# EAGLE board GPS_Breakout-Panel-v10 (EAGLE 6.3), part 1 of 2
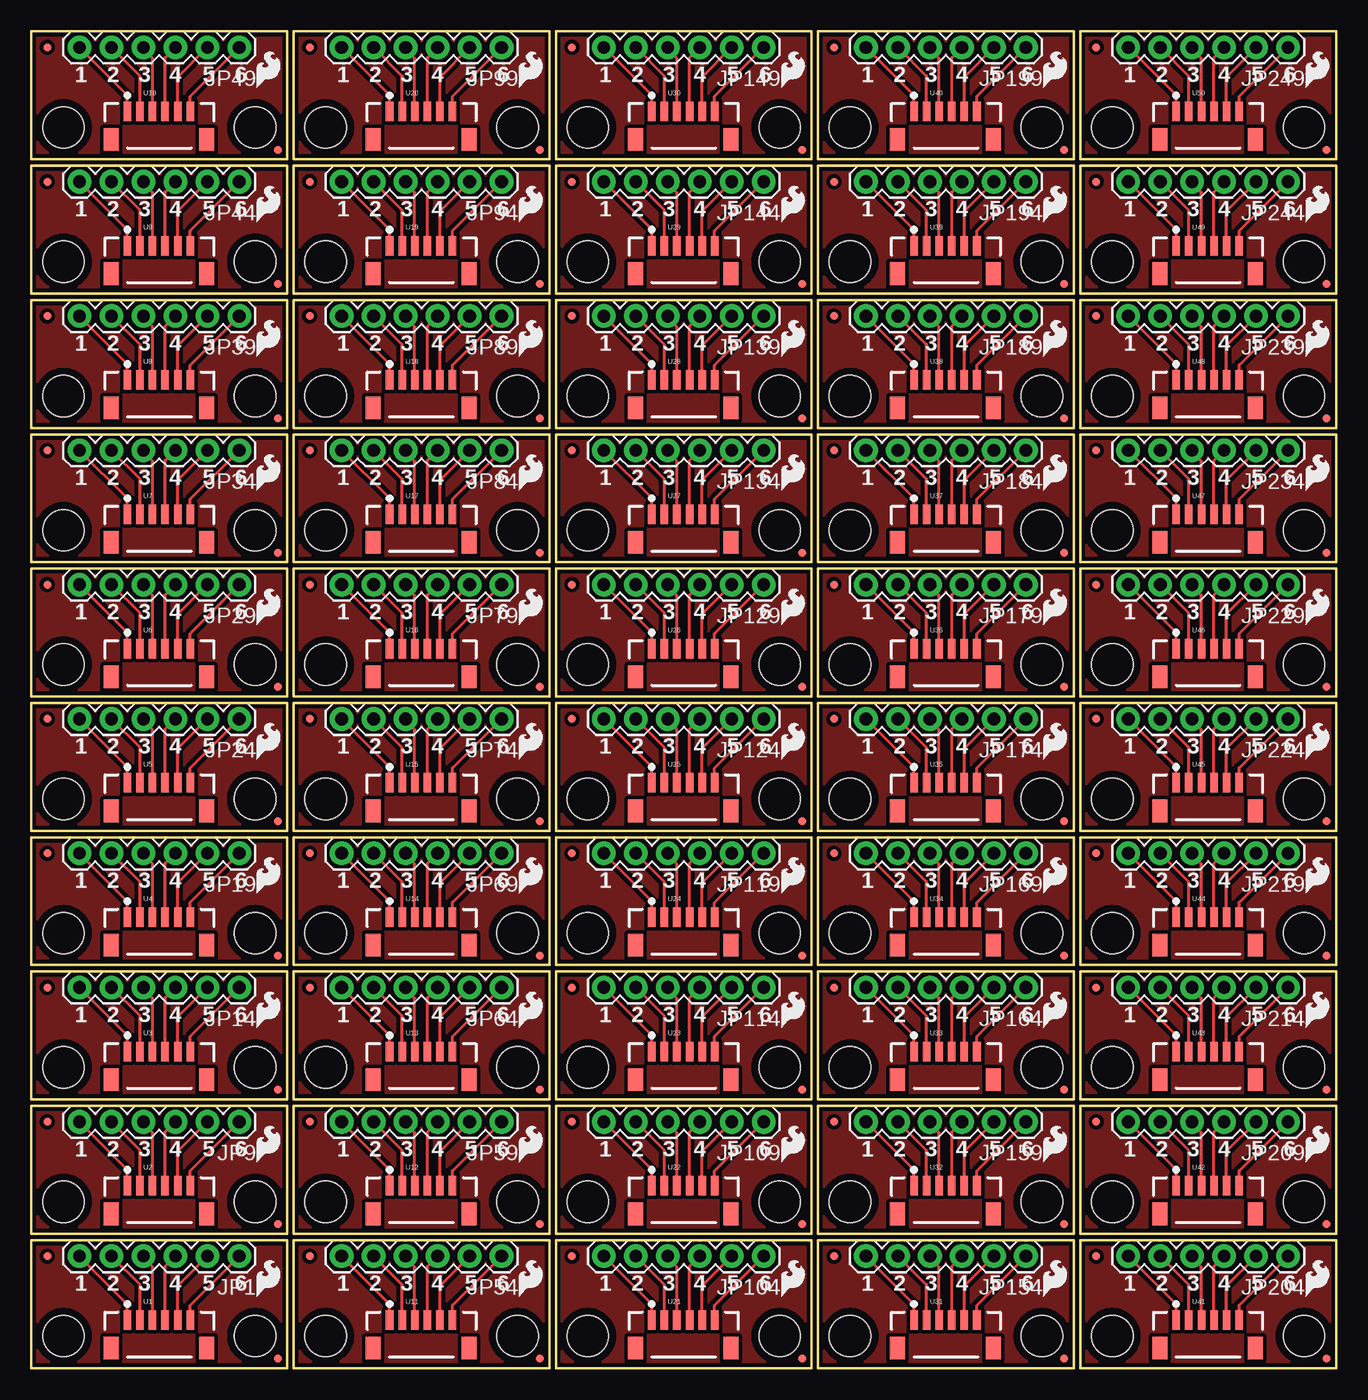
[diagram p0: board, top side]
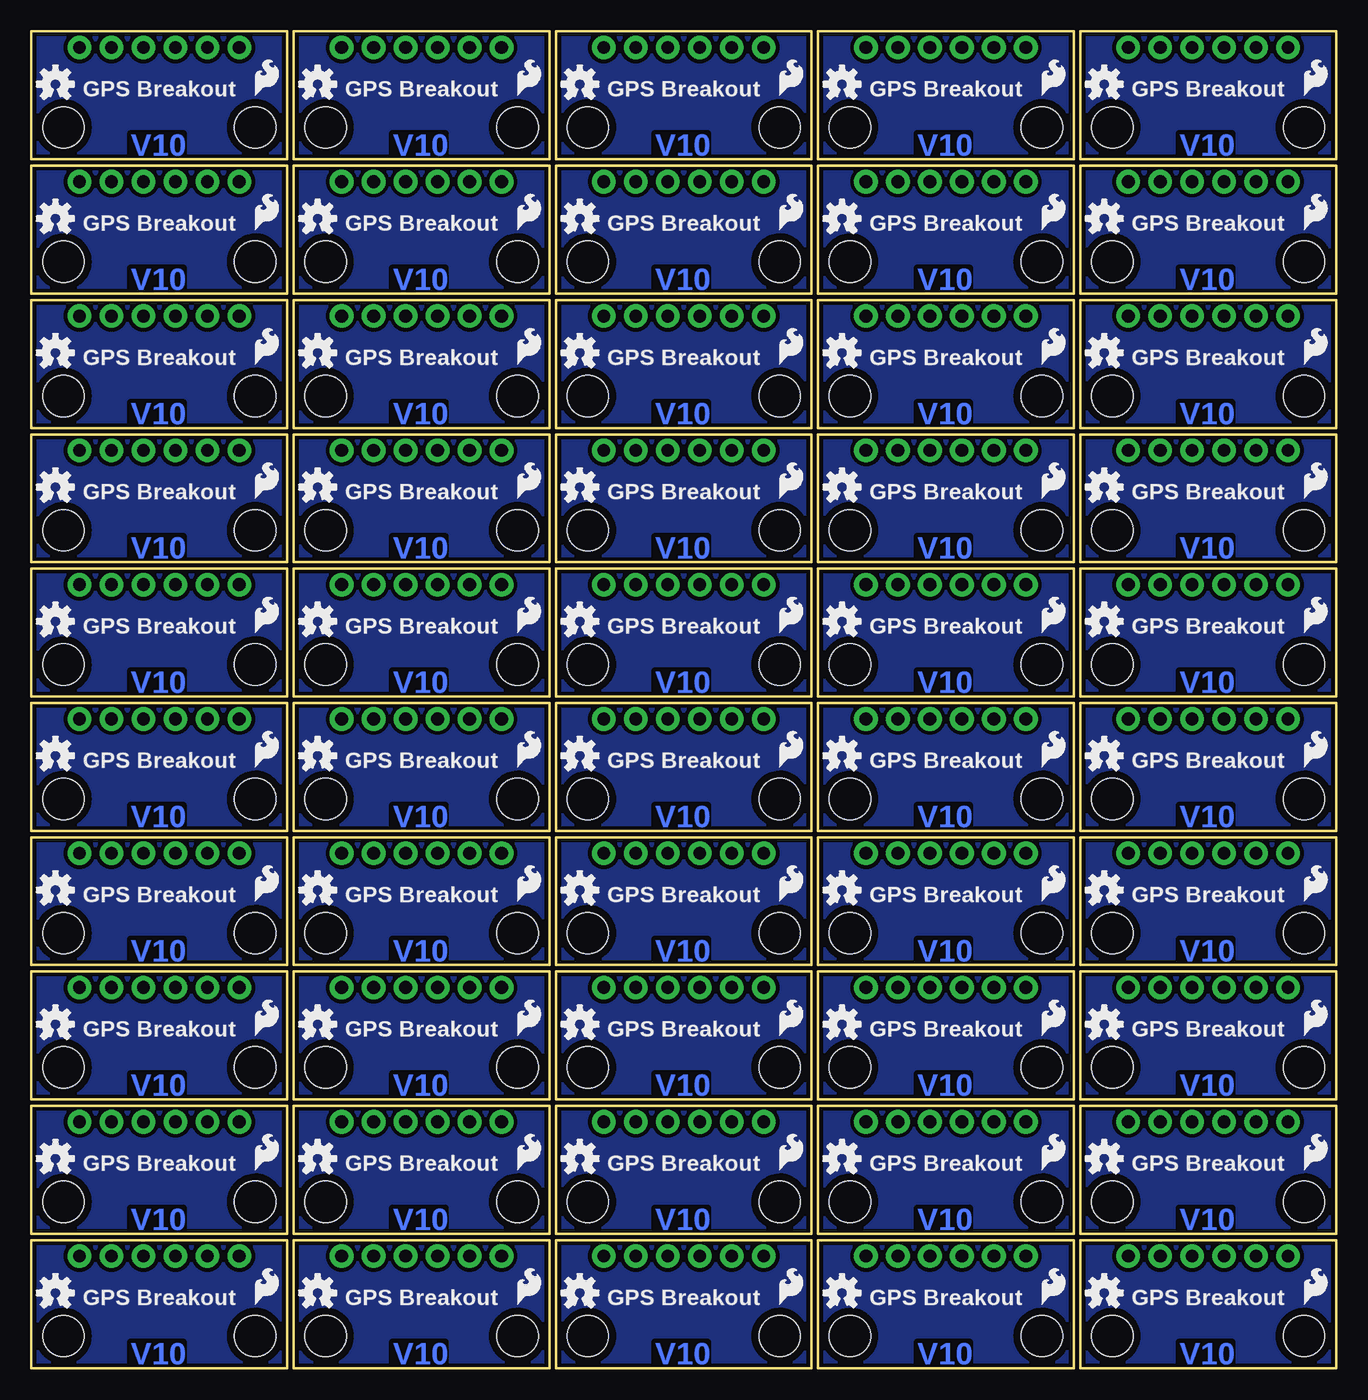
[diagram p1: board, bottom side, seen from below]

Size 103.63 x 106.17 mm. Coordinates in mm from the lower left corner, seen from the top.
Outline: 0,0 0,10.16 20.32,10.16 20.32,0 0,0
Outline: 0,10.67 0,20.83 20.32,20.83 20.32,10.67 0,10.67
Outline: 0,21.34 0,31.5 20.32,31.5 20.32,21.34 0,21.34
Outline: 0,32 0,42.16 20.32,42.16 20.32,32 0,32
Outline: 0,42.67 0,52.83 20.32,52.83 20.32,42.67 0,42.67
Outline: 0,53.34 0,63.5 20.32,63.5 20.32,53.34 0,53.34
Outline: 0,64.01 0,74.17 20.32,74.17 20.32,64.01 0,64.01
Outline: 0,74.68 0,84.84 20.32,84.84 20.32,74.68 0,74.68
Outline: 0,85.34 0,95.5 20.32,95.5 20.32,85.34 0,85.34
Outline: 0,96.01 0,106.17 20.32,106.17 20.32,96.01 0,96.01
Outline: 20.83,0 20.83,10.16 41.15,10.16 41.15,0 20.83,0
Outline: 20.83,10.67 20.83,20.83 41.15,20.83 41.15,10.67 20.83,10.67
Outline: 20.83,21.34 20.83,31.5 41.15,31.5 41.15,21.34 20.83,21.34
Outline: 20.83,32 20.83,42.16 41.15,42.16 41.15,32 20.83,32
Outline: 20.83,42.67 20.83,52.83 41.15,52.83 41.15,42.67 20.83,42.67
Outline: 20.83,53.34 20.83,63.5 41.15,63.5 41.15,53.34 20.83,53.34
Outline: 20.83,64.01 20.83,74.17 41.15,74.17 41.15,64.01 20.83,64.01
Outline: 20.83,74.68 20.83,84.84 41.15,84.84 41.15,74.68 20.83,74.68
Outline: 20.83,85.34 20.83,95.5 41.15,95.5 41.15,85.34 20.83,85.34
Outline: 20.83,96.01 20.83,106.17 41.15,106.17 41.15,96.01 20.83,96.01
Outline: 41.66,0 41.66,10.16 61.98,10.16 61.98,0 41.66,0
Outline: 41.66,10.67 41.66,20.83 61.98,20.83 61.98,10.67 41.66,10.67
Outline: 41.66,21.34 41.66,31.5 61.98,31.5 61.98,21.34 41.66,21.34
Outline: 41.66,32 41.66,42.16 61.98,42.16 61.98,32 41.66,32
Outline: 41.66,42.67 41.66,52.83 61.98,52.83 61.98,42.67 41.66,42.67
Outline: 41.66,53.34 41.66,63.5 61.98,63.5 61.98,53.34 41.66,53.34
Outline: 41.66,64.01 41.66,74.17 61.98,74.17 61.98,64.01 41.66,64.01
Outline: 41.66,74.68 41.66,84.84 61.98,84.84 61.98,74.68 41.66,74.68
Outline: 41.66,85.34 41.66,95.5 61.98,95.5 61.98,85.34 41.66,85.34
Outline: 41.66,96.01 41.66,106.17 61.98,106.17 61.98,96.01 41.66,96.01
Outline: 62.48,0 62.48,10.16 82.8,10.16 82.8,0 62.48,0
Outline: 62.48,10.67 62.48,20.83 82.8,20.83 82.8,10.67 62.48,10.67
Outline: 62.48,21.34 62.48,31.5 82.8,31.5 82.8,21.34 62.48,21.34
Outline: 62.48,32 62.48,42.16 82.8,42.16 82.8,32 62.48,32
Outline: 62.48,42.67 62.48,52.83 82.8,52.83 82.8,42.67 62.48,42.67
Outline: 62.48,53.34 62.48,63.5 82.8,63.5 82.8,53.34 62.48,53.34
Outline: 62.48,64.01 62.48,74.17 82.8,74.17 82.8,64.01 62.48,64.01
Outline: 62.48,74.68 62.48,84.84 82.8,84.84 82.8,74.68 62.48,74.68
Outline: 62.48,85.34 62.48,95.5 82.8,95.5 82.8,85.34 62.48,85.34
Outline: 62.48,96.01 62.48,106.17 82.8,106.17 82.8,96.01 62.48,96.01
Outline: 83.31,0 83.31,10.16 103.63,10.16 103.63,0 83.31,0
Outline: 83.31,10.67 83.31,20.83 103.63,20.83 103.63,10.67 83.31,10.67
Outline: 83.31,21.34 83.31,31.5 103.63,31.5 103.63,21.34 83.31,21.34
Outline: 83.31,32 83.31,42.16 103.63,42.16 103.63,32 83.31,32
Outline: 83.31,42.67 83.31,52.83 103.63,52.83 103.63,42.67 83.31,42.67
Outline: 83.31,53.34 83.31,63.5 103.63,63.5 103.63,53.34 83.31,53.34
Outline: 83.31,64.01 83.31,74.17 103.63,74.17 103.63,64.01 83.31,64.01
Outline: 83.31,74.68 83.31,84.84 103.63,84.84 103.63,74.68 83.31,74.68
Outline: 83.31,85.34 83.31,95.5 103.63,95.5 103.63,85.34 83.31,85.34
Outline: 83.31,96.01 83.31,106.17 103.63,106.17 103.63,96.01 83.31,96.01
Copper layers (1*16): Top 0.035mm / dielectric 1.5mm / Bottom 0.035mm
Design rules "default": minimum track width 8mil, minimum drill 20mil, track to track 8mil, track to pad 8mil, pad to pad 8mil, via to via 8mil, smd to smd 8mil, copper to edge 8mil, drill to drill 8mil, minimum pad ring 12mil, minimum via ring 10mil, stop-mask expansion 4mil, vias tented up to drill 20mil, thermal gap 10mil

## Footprints (pad centres in the part's own frame; a part is rotated, then mirrored left to right if it is on the bottom)
MICRO-FIDUCIAL = smd 0.635 x 0.635: 1 0,0
1X06 = drill 1.016 pad 1.88: 1 0,0; 2 2.54,0; 3 5.08,0; 4 7.62,0; 5 10.16,0; 6 12.7,0
STAND-OFF = hole 3.302: 0,0
JST-6-SMD-VERT-1.0MM = smd 0.6 x 1.55: 1 -2.54,1.27; 2 -1.54,1.27; 3 -0.54,1.27; 4 0.46,1.27; 5 1.46,1.27; 6 2.46,1.27 | smd 1.2 x 1.8: P$1 -3.84,-0.955; P$2 3.76,-0.955

## Placement (x,y rotation side)
FID1  FIDUCIALUFIDUCIAL  [MICRO-FIDUCIAL]  19.56,0.76 0 top
FID2  FIDUCIALUFIDUCIAL  [MICRO-FIDUCIAL]  1.27,8.89 0 top
FID3  FIDUCIALUFIDUCIAL  [MICRO-FIDUCIAL]  19.56,11.43 0 top
FID4  FIDUCIALUFIDUCIAL  [MICRO-FIDUCIAL]  1.27,19.56 0 top
FID5  FIDUCIALUFIDUCIAL  [MICRO-FIDUCIAL]  19.56,22.1 0 top
FID6  FIDUCIALUFIDUCIAL  [MICRO-FIDUCIAL]  1.27,30.23 0 top
FID7  FIDUCIALUFIDUCIAL  [MICRO-FIDUCIAL]  19.56,32.77 0 top
FID8  FIDUCIALUFIDUCIAL  [MICRO-FIDUCIAL]  1.27,40.89 0 top
FID9  FIDUCIALUFIDUCIAL  [MICRO-FIDUCIAL]  19.56,43.43 0 top
FID10  FIDUCIALUFIDUCIAL  [MICRO-FIDUCIAL]  1.27,51.56 0 top
FID11  FIDUCIALUFIDUCIAL  [MICRO-FIDUCIAL]  19.56,54.1 0 top
FID12  FIDUCIALUFIDUCIAL  [MICRO-FIDUCIAL]  1.27,62.23 0 top
FID13  FIDUCIALUFIDUCIAL  [MICRO-FIDUCIAL]  19.56,64.77 0 top
FID14  FIDUCIALUFIDUCIAL  [MICRO-FIDUCIAL]  1.27,72.9 0 top
FID15  FIDUCIALUFIDUCIAL  [MICRO-FIDUCIAL]  19.56,75.44 0 top
FID16  FIDUCIALUFIDUCIAL  [MICRO-FIDUCIAL]  1.27,83.57 0 top
FID17  FIDUCIALUFIDUCIAL  [MICRO-FIDUCIAL]  19.56,86.11 0 top
FID18  FIDUCIALUFIDUCIAL  [MICRO-FIDUCIAL]  1.27,94.23 0 top
FID19  FIDUCIALUFIDUCIAL  [MICRO-FIDUCIAL]  19.56,96.77 0 top
FID20  FIDUCIALUFIDUCIAL  [MICRO-FIDUCIAL]  1.27,104.9 0 top
FID21  FIDUCIALUFIDUCIAL  [MICRO-FIDUCIAL]  40.39,0.76 0 top
FID22  FIDUCIALUFIDUCIAL  [MICRO-FIDUCIAL]  22.1,8.89 0 top
FID23  FIDUCIALUFIDUCIAL  [MICRO-FIDUCIAL]  40.39,11.43 0 top
FID24  FIDUCIALUFIDUCIAL  [MICRO-FIDUCIAL]  22.1,19.56 0 top
FID25  FIDUCIALUFIDUCIAL  [MICRO-FIDUCIAL]  40.39,22.1 0 top
FID26  FIDUCIALUFIDUCIAL  [MICRO-FIDUCIAL]  22.1,30.23 0 top
FID27  FIDUCIALUFIDUCIAL  [MICRO-FIDUCIAL]  40.39,32.77 0 top
FID28  FIDUCIALUFIDUCIAL  [MICRO-FIDUCIAL]  22.1,40.89 0 top
FID29  FIDUCIALUFIDUCIAL  [MICRO-FIDUCIAL]  40.39,43.43 0 top
FID30  FIDUCIALUFIDUCIAL  [MICRO-FIDUCIAL]  22.1,51.56 0 top
FID31  FIDUCIALUFIDUCIAL  [MICRO-FIDUCIAL]  40.39,54.1 0 top
FID32  FIDUCIALUFIDUCIAL  [MICRO-FIDUCIAL]  22.1,62.23 0 top
FID33  FIDUCIALUFIDUCIAL  [MICRO-FIDUCIAL]  40.39,64.77 0 top
FID34  FIDUCIALUFIDUCIAL  [MICRO-FIDUCIAL]  22.1,72.9 0 top
FID35  FIDUCIALUFIDUCIAL  [MICRO-FIDUCIAL]  40.39,75.44 0 top
FID36  FIDUCIALUFIDUCIAL  [MICRO-FIDUCIAL]  22.1,83.57 0 top
FID37  FIDUCIALUFIDUCIAL  [MICRO-FIDUCIAL]  40.39,86.11 0 top
FID38  FIDUCIALUFIDUCIAL  [MICRO-FIDUCIAL]  22.1,94.23 0 top
FID39  FIDUCIALUFIDUCIAL  [MICRO-FIDUCIAL]  40.39,96.77 0 top
FID40  FIDUCIALUFIDUCIAL  [MICRO-FIDUCIAL]  22.1,104.9 0 top
FID41  FIDUCIALUFIDUCIAL  [MICRO-FIDUCIAL]  61.21,0.76 0 top
FID42  FIDUCIALUFIDUCIAL  [MICRO-FIDUCIAL]  42.93,8.89 0 top
FID43  FIDUCIALUFIDUCIAL  [MICRO-FIDUCIAL]  61.21,11.43 0 top
FID44  FIDUCIALUFIDUCIAL  [MICRO-FIDUCIAL]  42.93,19.56 0 top
FID45  FIDUCIALUFIDUCIAL  [MICRO-FIDUCIAL]  61.21,22.1 0 top
FID46  FIDUCIALUFIDUCIAL  [MICRO-FIDUCIAL]  42.93,30.23 0 top
FID47  FIDUCIALUFIDUCIAL  [MICRO-FIDUCIAL]  61.21,32.77 0 top
FID48  FIDUCIALUFIDUCIAL  [MICRO-FIDUCIAL]  42.93,40.89 0 top
FID49  FIDUCIALUFIDUCIAL  [MICRO-FIDUCIAL]  61.21,43.43 0 top
FID50  FIDUCIALUFIDUCIAL  [MICRO-FIDUCIAL]  42.93,51.56 0 top
FID51  FIDUCIALUFIDUCIAL  [MICRO-FIDUCIAL]  61.21,54.1 0 top
FID52  FIDUCIALUFIDUCIAL  [MICRO-FIDUCIAL]  42.93,62.23 0 top
FID53  FIDUCIALUFIDUCIAL  [MICRO-FIDUCIAL]  61.21,64.77 0 top
FID54  FIDUCIALUFIDUCIAL  [MICRO-FIDUCIAL]  42.93,72.9 0 top
FID55  FIDUCIALUFIDUCIAL  [MICRO-FIDUCIAL]  61.21,75.44 0 top
FID56  FIDUCIALUFIDUCIAL  [MICRO-FIDUCIAL]  42.93,83.57 0 top
FID57  FIDUCIALUFIDUCIAL  [MICRO-FIDUCIAL]  61.21,86.11 0 top
FID58  FIDUCIALUFIDUCIAL  [MICRO-FIDUCIAL]  42.93,94.23 0 top
FID59  FIDUCIALUFIDUCIAL  [MICRO-FIDUCIAL]  61.21,96.77 0 top
FID60  FIDUCIALUFIDUCIAL  [MICRO-FIDUCIAL]  42.93,104.9 0 top
FID61  FIDUCIALUFIDUCIAL  [MICRO-FIDUCIAL]  82.04,0.76 0 top
FID62  FIDUCIALUFIDUCIAL  [MICRO-FIDUCIAL]  63.75,8.89 0 top
FID63  FIDUCIALUFIDUCIAL  [MICRO-FIDUCIAL]  82.04,11.43 0 top
FID64  FIDUCIALUFIDUCIAL  [MICRO-FIDUCIAL]  63.75,19.56 0 top
FID65  FIDUCIALUFIDUCIAL  [MICRO-FIDUCIAL]  82.04,22.1 0 top
FID66  FIDUCIALUFIDUCIAL  [MICRO-FIDUCIAL]  63.75,30.23 0 top
FID67  FIDUCIALUFIDUCIAL  [MICRO-FIDUCIAL]  82.04,32.77 0 top
FID68  FIDUCIALUFIDUCIAL  [MICRO-FIDUCIAL]  63.75,40.89 0 top
FID69  FIDUCIALUFIDUCIAL  [MICRO-FIDUCIAL]  82.04,43.43 0 top
FID70  FIDUCIALUFIDUCIAL  [MICRO-FIDUCIAL]  63.75,51.56 0 top
FID71  FIDUCIALUFIDUCIAL  [MICRO-FIDUCIAL]  82.04,54.1 0 top
FID72  FIDUCIALUFIDUCIAL  [MICRO-FIDUCIAL]  63.75,62.23 0 top
FID73  FIDUCIALUFIDUCIAL  [MICRO-FIDUCIAL]  82.04,64.77 0 top
FID74  FIDUCIALUFIDUCIAL  [MICRO-FIDUCIAL]  63.75,72.9 0 top
FID75  FIDUCIALUFIDUCIAL  [MICRO-FIDUCIAL]  82.04,75.44 0 top
FID76  FIDUCIALUFIDUCIAL  [MICRO-FIDUCIAL]  63.75,83.57 0 top
FID77  FIDUCIALUFIDUCIAL  [MICRO-FIDUCIAL]  82.04,86.11 0 top
FID78  FIDUCIALUFIDUCIAL  [MICRO-FIDUCIAL]  63.75,94.23 0 top
FID79  FIDUCIALUFIDUCIAL  [MICRO-FIDUCIAL]  82.04,96.77 0 top
FID80  FIDUCIALUFIDUCIAL  [MICRO-FIDUCIAL]  63.75,104.9 0 top
FID81  FIDUCIALUFIDUCIAL  [MICRO-FIDUCIAL]  102.87,0.76 0 top
FID82  FIDUCIALUFIDUCIAL  [MICRO-FIDUCIAL]  84.58,8.89 0 top
FID83  FIDUCIALUFIDUCIAL  [MICRO-FIDUCIAL]  102.87,11.43 0 top
FID84  FIDUCIALUFIDUCIAL  [MICRO-FIDUCIAL]  84.58,19.56 0 top
FID85  FIDUCIALUFIDUCIAL  [MICRO-FIDUCIAL]  102.87,22.1 0 top
FID86  FIDUCIALUFIDUCIAL  [MICRO-FIDUCIAL]  84.58,30.23 0 top
FID87  FIDUCIALUFIDUCIAL  [MICRO-FIDUCIAL]  102.87,32.77 0 top
FID88  FIDUCIALUFIDUCIAL  [MICRO-FIDUCIAL]  84.58,40.89 0 top
FID89  FIDUCIALUFIDUCIAL  [MICRO-FIDUCIAL]  102.87,43.43 0 top
FID90  FIDUCIALUFIDUCIAL  [MICRO-FIDUCIAL]  84.58,51.56 0 top
FID91  FIDUCIALUFIDUCIAL  [MICRO-FIDUCIAL]  102.87,54.1 0 top
FID92  FIDUCIALUFIDUCIAL  [MICRO-FIDUCIAL]  84.58,62.23 0 top
FID93  FIDUCIALUFIDUCIAL  [MICRO-FIDUCIAL]  102.87,64.77 0 top
FID94  FIDUCIALUFIDUCIAL  [MICRO-FIDUCIAL]  84.58,72.9 0 top
FID95  FIDUCIALUFIDUCIAL  [MICRO-FIDUCIAL]  102.87,75.44 0 top
FID96  FIDUCIALUFIDUCIAL  [MICRO-FIDUCIAL]  84.58,83.57 0 top
FID97  FIDUCIALUFIDUCIAL  [MICRO-FIDUCIAL]  102.87,86.11 0 top
FID98  FIDUCIALUFIDUCIAL  [MICRO-FIDUCIAL]  84.58,94.23 0 top
FID99  FIDUCIALUFIDUCIAL  [MICRO-FIDUCIAL]  102.87,96.77 0 top
FID100  FIDUCIALUFIDUCIAL  [MICRO-FIDUCIAL]  84.58,104.9 0 top
JP1  [1X06]  16.51,8.89 180 top
JP2  LOGO-SFESK  [SFE-LOGO-FLAME]  17.91,5.71 0 top
JP3  STAND-OFF  [STAND-OFF]  2.54,13.21 0 top
JP4  STAND-OFF  [STAND-OFF]  2.54,2.54 0 top
JP5  STAND-OFF  [STAND-OFF]  17.78,13.21 0 top
JP6  STAND-OFF  [STAND-OFF]  17.78,2.54 0 top
JP7  LOGO-SFESK  [SFE-LOGO-FLAME]  2.54,5.08 0 bottom
JP8  LOGO-SFESK  [SFE-LOGO-FLAME]  2.54,15.75 0 bottom
JP9  [1X06]  16.51,19.56 180 top
JP10  LOGO-SFESK  [SFE-LOGO-FLAME]  17.91,16.38 0 top
JP11  STAND-OFF  [STAND-OFF]  2.54,23.88 0 top
JP12  STAND-OFF  [STAND-OFF]  17.78,23.88 0 top
JP13  LOGO-SFESK  [SFE-LOGO-FLAME]  2.54,26.42 0 bottom
JP14  [1X06]  16.51,30.23 180 top
JP15  LOGO-SFESK  [SFE-LOGO-FLAME]  17.91,27.05 0 top
JP16  STAND-OFF  [STAND-OFF]  2.54,34.54 0 top
JP17  STAND-OFF  [STAND-OFF]  17.78,34.54 0 top
JP18  LOGO-SFESK  [SFE-LOGO-FLAME]  2.54,37.08 0 bottom
JP19  [1X06]  16.51,40.89 180 top
JP20  LOGO-SFESK  [SFE-LOGO-FLAME]  17.91,37.72 0 top
JP21  STAND-OFF  [STAND-OFF]  2.54,45.21 0 top
JP22  STAND-OFF  [STAND-OFF]  17.78,45.21 0 top
JP23  LOGO-SFESK  [SFE-LOGO-FLAME]  2.54,47.75 0 bottom
JP24  [1X06]  16.51,51.56 180 top
JP25  LOGO-SFESK  [SFE-LOGO-FLAME]  17.91,48.39 0 top
JP26  STAND-OFF  [STAND-OFF]  2.54,55.88 0 top
JP27  STAND-OFF  [STAND-OFF]  17.78,55.88 0 top
JP28  LOGO-SFESK  [SFE-LOGO-FLAME]  2.54,58.42 0 bottom
JP29  [1X06]  16.51,62.23 180 top
JP30  LOGO-SFESK  [SFE-LOGO-FLAME]  17.91,59.05 0 top
JP31  STAND-OFF  [STAND-OFF]  2.54,66.55 0 top
JP32  STAND-OFF  [STAND-OFF]  17.78,66.55 0 top
JP33  LOGO-SFESK  [SFE-LOGO-FLAME]  2.54,69.09 0 bottom
JP34  [1X06]  16.51,72.9 180 top
JP35  LOGO-SFESK  [SFE-LOGO-FLAME]  17.91,69.72 0 top
JP36  STAND-OFF  [STAND-OFF]  2.54,77.22 0 top
JP37  STAND-OFF  [STAND-OFF]  17.78,77.22 0 top
JP38  LOGO-SFESK  [SFE-LOGO-FLAME]  2.54,79.76 0 bottom
JP39  [1X06]  16.51,83.57 180 top
JP40  LOGO-SFESK  [SFE-LOGO-FLAME]  17.91,80.39 0 top
JP41  STAND-OFF  [STAND-OFF]  2.54,87.88 0 top
JP42  STAND-OFF  [STAND-OFF]  17.78,87.88 0 top
JP43  LOGO-SFESK  [SFE-LOGO-FLAME]  2.54,90.42 0 bottom
JP44  [1X06]  16.51,94.23 180 top
JP45  LOGO-SFESK  [SFE-LOGO-FLAME]  17.91,91.06 0 top
JP46  STAND-OFF  [STAND-OFF]  2.54,98.55 0 top
JP47  STAND-OFF  [STAND-OFF]  17.78,98.55 0 top
JP48  LOGO-SFESK  [SFE-LOGO-FLAME]  2.54,101.09 0 bottom
JP49  [1X06]  16.51,104.9 180 top
JP50  LOGO-SFESK  [SFE-LOGO-FLAME]  17.91,101.73 0 top
JP51  STAND-OFF  [STAND-OFF]  23.37,2.54 0 top
JP52  STAND-OFF  [STAND-OFF]  38.61,2.54 0 top
JP53  LOGO-SFESK  [SFE-LOGO-FLAME]  23.37,5.08 0 bottom
JP54  [1X06]  37.34,8.89 180 top
JP55  LOGO-SFESK  [SFE-LOGO-FLAME]  38.73,5.71 0 top
JP56  STAND-OFF  [STAND-OFF]  23.37,13.21 0 top
JP57  STAND-OFF  [STAND-OFF]  38.61,13.21 0 top
JP58  LOGO-SFESK  [SFE-LOGO-FLAME]  23.37,15.75 0 bottom
JP59  [1X06]  37.34,19.56 180 top
JP60  LOGO-SFESK  [SFE-LOGO-FLAME]  38.73,16.38 0 top
JP61  STAND-OFF  [STAND-OFF]  23.37,23.88 0 top
JP62  STAND-OFF  [STAND-OFF]  38.61,23.88 0 top
JP63  LOGO-SFESK  [SFE-LOGO-FLAME]  23.37,26.42 0 bottom
JP64  [1X06]  37.34,30.23 180 top
JP65  LOGO-SFESK  [SFE-LOGO-FLAME]  38.73,27.05 0 top
JP66  STAND-OFF  [STAND-OFF]  23.37,34.54 0 top
JP67  STAND-OFF  [STAND-OFF]  38.61,34.54 0 top
JP68  LOGO-SFESK  [SFE-LOGO-FLAME]  23.37,37.08 0 bottom
JP69  [1X06]  37.34,40.89 180 top
JP70  LOGO-SFESK  [SFE-LOGO-FLAME]  38.73,37.72 0 top
JP71  STAND-OFF  [STAND-OFF]  23.37,45.21 0 top
JP72  STAND-OFF  [STAND-OFF]  38.61,45.21 0 top
JP73  LOGO-SFESK  [SFE-LOGO-FLAME]  23.37,47.75 0 bottom
JP74  [1X06]  37.34,51.56 180 top
JP75  LOGO-SFESK  [SFE-LOGO-FLAME]  38.73,48.39 0 top
JP76  STAND-OFF  [STAND-OFF]  23.37,55.88 0 top
JP77  STAND-OFF  [STAND-OFF]  38.61,55.88 0 top
JP78  LOGO-SFESK  [SFE-LOGO-FLAME]  23.37,58.42 0 bottom
JP79  [1X06]  37.34,62.23 180 top
JP80  LOGO-SFESK  [SFE-LOGO-FLAME]  38.73,59.05 0 top
JP81  STAND-OFF  [STAND-OFF]  23.37,66.55 0 top
JP82  STAND-OFF  [STAND-OFF]  38.61,66.55 0 top
JP83  LOGO-SFESK  [SFE-LOGO-FLAME]  23.37,69.09 0 bottom
JP84  [1X06]  37.34,72.9 180 top
JP85  LOGO-SFESK  [SFE-LOGO-FLAME]  38.73,69.72 0 top
JP86  STAND-OFF  [STAND-OFF]  23.37,77.22 0 top
JP87  STAND-OFF  [STAND-OFF]  38.61,77.22 0 top
JP88  LOGO-SFESK  [SFE-LOGO-FLAME]  23.37,79.76 0 bottom
JP89  [1X06]  37.34,83.57 180 top
JP90  LOGO-SFESK  [SFE-LOGO-FLAME]  38.73,80.39 0 top
JP91  STAND-OFF  [STAND-OFF]  23.37,87.88 0 top
JP92  STAND-OFF  [STAND-OFF]  38.61,87.88 0 top
JP93  LOGO-SFESK  [SFE-LOGO-FLAME]  23.37,90.42 0 bottom
JP94  [1X06]  37.34,94.23 180 top
JP95  LOGO-SFESK  [SFE-LOGO-FLAME]  38.73,91.06 0 top
JP96  STAND-OFF  [STAND-OFF]  23.37,98.55 0 top
JP97  STAND-OFF  [STAND-OFF]  38.61,98.55 0 top
JP98  LOGO-SFESK  [SFE-LOGO-FLAME]  23.37,101.09 0 bottom
JP99  [1X06]  37.34,104.9 180 top
JP100  LOGO-SFESK  [SFE-LOGO-FLAME]  38.73,101.73 0 top
JP101  STAND-OFF  [STAND-OFF]  44.2,2.54 0 top
JP102  STAND-OFF  [STAND-OFF]  59.44,2.54 0 top
JP103  LOGO-SFESK  [SFE-LOGO-FLAME]  44.2,5.08 0 bottom
JP104  [1X06]  58.17,8.89 180 top
JP105  LOGO-SFESK  [SFE-LOGO-FLAME]  59.56,5.71 0 top
JP106  STAND-OFF  [STAND-OFF]  44.2,13.21 0 top
JP107  STAND-OFF  [STAND-OFF]  59.44,13.21 0 top
JP108  LOGO-SFESK  [SFE-LOGO-FLAME]  44.2,15.75 0 bottom
JP109  [1X06]  58.17,19.56 180 top
JP110  LOGO-SFESK  [SFE-LOGO-FLAME]  59.56,16.38 0 top
JP111  STAND-OFF  [STAND-OFF]  44.2,23.88 0 top
JP112  STAND-OFF  [STAND-OFF]  59.44,23.88 0 top
JP113  LOGO-SFESK  [SFE-LOGO-FLAME]  44.2,26.42 0 bottom
JP114  [1X06]  58.17,30.23 180 top
JP115  LOGO-SFESK  [SFE-LOGO-FLAME]  59.56,27.05 0 top
JP116  STAND-OFF  [STAND-OFF]  44.2,34.54 0 top
JP117  STAND-OFF  [STAND-OFF]  59.44,34.54 0 top
JP118  LOGO-SFESK  [SFE-LOGO-FLAME]  44.2,37.08 0 bottom
JP119  [1X06]  58.17,40.89 180 top
JP120  LOGO-SFESK  [SFE-LOGO-FLAME]  59.56,37.72 0 top
JP121  STAND-OFF  [STAND-OFF]  44.2,45.21 0 top
JP122  STAND-OFF  [STAND-OFF]  59.44,45.21 0 top
JP123  LOGO-SFESK  [SFE-LOGO-FLAME]  44.2,47.75 0 bottom
JP124  [1X06]  58.17,51.56 180 top
JP125  LOGO-SFESK  [SFE-LOGO-FLAME]  59.56,48.39 0 top
JP126  STAND-OFF  [STAND-OFF]  44.2,55.88 0 top
JP127  STAND-OFF  [STAND-OFF]  59.44,55.88 0 top
JP128  LOGO-SFESK  [SFE-LOGO-FLAME]  44.2,58.42 0 bottom
JP129  [1X06]  58.17,62.23 180 top
JP130  LOGO-SFESK  [SFE-LOGO-FLAME]  59.56,59.05 0 top
JP131  STAND-OFF  [STAND-OFF]  44.2,66.55 0 top
JP132  STAND-OFF  [STAND-OFF]  59.44,66.55 0 top
JP133  LOGO-SFESK  [SFE-LOGO-FLAME]  44.2,69.09 0 bottom
JP134  [1X06]  58.17,72.9 180 top
JP135  LOGO-SFESK  [SFE-LOGO-FLAME]  59.56,69.72 0 top
JP136  STAND-OFF  [STAND-OFF]  44.2,77.22 0 top
JP137  STAND-OFF  [STAND-OFF]  59.44,77.22 0 top
JP138  LOGO-SFESK  [SFE-LOGO-FLAME]  44.2,79.76 0 bottom
JP139  [1X06]  58.17,83.57 180 top
JP140  LOGO-SFESK  [SFE-LOGO-FLAME]  59.56,80.39 0 top
JP141  STAND-OFF  [STAND-OFF]  44.2,87.88 0 top
JP142  STAND-OFF  [STAND-OFF]  59.44,87.88 0 top
JP143  LOGO-SFESK  [SFE-LOGO-FLAME]  44.2,90.42 0 bottom
JP144  [1X06]  58.17,94.23 180 top
JP145  LOGO-SFESK  [SFE-LOGO-FLAME]  59.56,91.06 0 top
JP146  STAND-OFF  [STAND-OFF]  44.2,98.55 0 top
JP147  STAND-OFF  [STAND-OFF]  59.44,98.55 0 top
JP148  LOGO-SFESK  [SFE-LOGO-FLAME]  44.2,101.09 0 bottom
JP149  [1X06]  58.17,104.9 180 top
JP150  LOGO-SFESK  [SFE-LOGO-FLAME]  59.56,101.73 0 top
JP151  STAND-OFF  [STAND-OFF]  65.02,2.54 0 top
JP152  STAND-OFF  [STAND-OFF]  80.26,2.54 0 top
JP153  LOGO-SFESK  [SFE-LOGO-FLAME]  65.02,5.08 0 bottom
JP154  [1X06]  78.99,8.89 180 top
JP155  LOGO-SFESK  [SFE-LOGO-FLAME]  80.39,5.71 0 top
JP156  STAND-OFF  [STAND-OFF]  65.02,13.21 0 top
JP157  STAND-OFF  [STAND-OFF]  80.26,13.21 0 top
JP158  LOGO-SFESK  [SFE-LOGO-FLAME]  65.02,15.75 0 bottom
JP159  [1X06]  78.99,19.56 180 top
JP160  LOGO-SFESK  [SFE-LOGO-FLAME]  80.39,16.38 0 top
JP161  STAND-OFF  [STAND-OFF]  65.02,23.88 0 top
JP162  STAND-OFF  [STAND-OFF]  80.26,23.88 0 top
JP163  LOGO-SFESK  [SFE-LOGO-FLAME]  65.02,26.42 0 bottom
JP164  [1X06]  78.99,30.23 180 top
JP165  LOGO-SFESK  [SFE-LOGO-FLAME]  80.39,27.05 0 top
JP166  STAND-OFF  [STAND-OFF]  65.02,34.54 0 top
JP167  STAND-OFF  [STAND-OFF]  80.26,34.54 0 top
JP168  LOGO-SFESK  [SFE-LOGO-FLAME]  65.02,37.08 0 bottom
JP169  [1X06]  78.99,40.89 180 top
JP170  LOGO-SFESK  [SFE-LOGO-FLAME]  80.39,37.72 0 top
JP171  STAND-OFF  [STAND-OFF]  65.02,45.21 0 top
JP172  STAND-OFF  [STAND-OFF]  80.26,45.21 0 top
JP173  LOGO-SFESK  [SFE-LOGO-FLAME]  65.02,47.75 0 bottom
JP174  [1X06]  78.99,51.56 180 top
JP175  LOGO-SFESK  [SFE-LOGO-FLAME]  80.39,48.39 0 top
JP176  STAND-OFF  [STAND-OFF]  65.02,55.88 0 top
JP177  STAND-OFF  [STAND-OFF]  80.26,55.88 0 top
JP178  LOGO-SFESK  [SFE-LOGO-FLAME]  65.02,58.42 0 bottom
JP179  [1X06]  78.99,62.23 180 top
JP180  LOGO-SFESK  [SFE-LOGO-FLAME]  80.39,59.05 0 top
JP181  STAND-OFF  [STAND-OFF]  65.02,66.55 0 top
JP182  STAND-OFF  [STAND-OFF]  80.26,66.55 0 top
JP183  LOGO-SFESK  [SFE-LOGO-FLAME]  65.02,69.09 0 bottom
JP184  [1X06]  78.99,72.9 180 top
JP185  LOGO-SFESK  [SFE-LOGO-FLAME]  80.39,69.72 0 top
JP186  STAND-OFF  [STAND-OFF]  65.02,77.22 0 top
JP187  STAND-OFF  [STAND-OFF]  80.26,77.22 0 top
JP188  LOGO-SFESK  [SFE-LOGO-FLAME]  65.02,79.76 0 bottom
JP189  [1X06]  78.99,83.57 180 top
JP190  LOGO-SFESK  [SFE-LOGO-FLAME]  80.39,80.39 0 top
JP191  STAND-OFF  [STAND-OFF]  65.02,87.88 0 top
JP192  STAND-OFF  [STAND-OFF]  80.26,87.88 0 top
JP193  LOGO-SFESK  [SFE-LOGO-FLAME]  65.02,90.42 0 bottom
JP194  [1X06]  78.99,94.23 180 top
JP195  LOGO-SFESK  [SFE-LOGO-FLAME]  80.39,91.06 0 top
JP196  STAND-OFF  [STAND-OFF]  65.02,98.55 0 top
JP197  STAND-OFF  [STAND-OFF]  80.26,98.55 0 top
JP198  LOGO-SFESK  [SFE-LOGO-FLAME]  65.02,101.09 0 bottom
JP199  [1X06]  78.99,104.9 180 top
JP200  LOGO-SFESK  [SFE-LOGO-FLAME]  80.39,101.73 0 top
JP201  STAND-OFF  [STAND-OFF]  85.85,2.54 0 top
JP202  STAND-OFF  [STAND-OFF]  101.09,2.54 0 top
JP203  LOGO-SFESK  [SFE-LOGO-FLAME]  85.85,5.08 0 bottom
JP204  [1X06]  99.82,8.89 180 top
JP205  LOGO-SFESK  [SFE-LOGO-FLAME]  101.22,5.71 0 top
JP206  STAND-OFF  [STAND-OFF]  85.85,13.21 0 top
JP207  STAND-OFF  [STAND-OFF]  101.09,13.21 0 top
JP208  LOGO-SFESK  [SFE-LOGO-FLAME]  85.85,15.75 0 bottom
JP209  [1X06]  99.82,19.56 180 top
JP210  LOGO-SFESK  [SFE-LOGO-FLAME]  101.22,16.38 0 top
JP211  STAND-OFF  [STAND-OFF]  85.85,23.88 0 top
JP212  STAND-OFF  [STAND-OFF]  101.09,23.88 0 top
JP213  LOGO-SFESK  [SFE-LOGO-FLAME]  85.85,26.42 0 bottom
JP214  [1X06]  99.82,30.23 180 top
JP215  LOGO-SFESK  [SFE-LOGO-FLAME]  101.22,27.05 0 top
JP216  STAND-OFF  [STAND-OFF]  85.85,34.54 0 top
JP217  STAND-OFF  [STAND-OFF]  101.09,34.54 0 top
JP218  LOGO-SFESK  [SFE-LOGO-FLAME]  85.85,37.08 0 bottom
JP219  [1X06]  99.82,40.89 180 top
JP220  LOGO-SFESK  [SFE-LOGO-FLAME]  101.22,37.72 0 top
JP221  STAND-OFF  [STAND-OFF]  85.85,45.21 0 top
JP222  STAND-OFF  [STAND-OFF]  101.09,45.21 0 top
JP223  LOGO-SFESK  [SFE-LOGO-FLAME]  85.85,47.75 0 bottom
JP224  [1X06]  99.82,51.56 180 top
JP225  LOGO-SFESK  [SFE-LOGO-FLAME]  101.22,48.39 0 top
JP226  STAND-OFF  [STAND-OFF]  85.85,55.88 0 top
JP227  STAND-OFF  [STAND-OFF]  101.09,55.88 0 top
JP228  LOGO-SFESK  [SFE-LOGO-FLAME]  85.85,58.42 0 bottom
JP229  [1X06]  99.82,62.23 180 top
JP230  LOGO-SFESK  [SFE-LOGO-FLAME]  101.22,59.05 0 top
JP231  STAND-OFF  [STAND-OFF]  85.85,66.55 0 top
JP232  STAND-OFF  [STAND-OFF]  101.09,66.55 0 top
JP233  LOGO-SFESK  [SFE-LOGO-FLAME]  85.85,69.09 0 bottom
JP234  [1X06]  99.82,72.9 180 top
JP235  LOGO-SFESK  [SFE-LOGO-FLAME]  101.22,69.72 0 top
JP236  STAND-OFF  [STAND-OFF]  85.85,77.22 0 top
JP237  STAND-OFF  [STAND-OFF]  101.09,77.22 0 top
JP238  LOGO-SFESK  [SFE-LOGO-FLAME]  85.85,79.76 0 bottom
JP239  [1X06]  99.82,83.57 180 top
JP240  LOGO-SFESK  [SFE-LOGO-FLAME]  101.22,80.39 0 top
JP241  STAND-OFF  [STAND-OFF]  85.85,87.88 0 top
JP242  STAND-OFF  [STAND-OFF]  101.09,87.88 0 top
JP243  LOGO-SFESK  [SFE-LOGO-FLAME]  85.85,90.42 0 bottom
JP244  [1X06]  99.82,94.23 180 top
JP245  LOGO-SFESK  [SFE-LOGO-FLAME]  101.22,91.06 0 top
JP246  STAND-OFF  [STAND-OFF]  85.85,98.55 0 top
JP247  STAND-OFF  [STAND-OFF]  101.09,98.55 0 top
JP248  LOGO-SFESK  [SFE-LOGO-FLAME]  85.85,101.09 0 bottom
JP249  [1X06]  99.82,104.9 180 top
JP250  LOGO-SFESK  [SFE-LOGO-FLAME]  101.22,101.73 0 top
LOGO1  OSHW-LOGOS  [OSHW-LOGO-S]  18.41,5.97 0 bottom
LOGO2  OSHW-LOGOS  [OSHW-LOGO-S]  18.41,16.64 0 bottom
LOGO3  OSHW-LOGOS  [OSHW-LOGO-S]  18.41,27.3 0 bottom
LOGO4  OSHW-LOGOS  [OSHW-LOGO-S]  18.41,37.97 0 bottom
LOGO5  OSHW-LOGOS  [OSHW-LOGO-S]  18.41,48.64 0 bottom
LOGO6  OSHW-LOGOS  [OSHW-LOGO-S]  18.41,59.31 0 bottom
LOGO7  OSHW-LOGOS  [OSHW-LOGO-S]  18.41,69.98 0 bottom
LOGO8  OSHW-LOGOS  [OSHW-LOGO-S]  18.41,80.64 0 bottom
LOGO9  OSHW-LOGOS  [OSHW-LOGO-S]  18.41,91.31 0 bottom
LOGO10  OSHW-LOGOS  [OSHW-LOGO-S]  18.41,101.98 0 bottom
LOGO11  OSHW-LOGOS  [OSHW-LOGO-S]  39.24,5.97 0 bottom
LOGO12  OSHW-LOGOS  [OSHW-LOGO-S]  39.24,16.64 0 bottom
LOGO13  OSHW-LOGOS  [OSHW-LOGO-S]  39.24,27.3 0 bottom
LOGO14  OSHW-LOGOS  [OSHW-LOGO-S]  39.24,37.97 0 bottom
LOGO15  OSHW-LOGOS  [OSHW-LOGO-S]  39.24,48.64 0 bottom
LOGO16  OSHW-LOGOS  [OSHW-LOGO-S]  39.24,59.31 0 bottom
LOGO17  OSHW-LOGOS  [OSHW-LOGO-S]  39.24,69.98 0 bottom
LOGO18  OSHW-LOGOS  [OSHW-LOGO-S]  39.24,80.64 0 bottom
LOGO19  OSHW-LOGOS  [OSHW-LOGO-S]  39.24,91.31 0 bottom
LOGO20  OSHW-LOGOS  [OSHW-LOGO-S]  39.24,101.98 0 bottom
LOGO21  OSHW-LOGOS  [OSHW-LOGO-S]  60.07,5.97 0 bottom
LOGO22  OSHW-LOGOS  [OSHW-LOGO-S]  60.07,16.64 0 bottom
LOGO23  OSHW-LOGOS  [OSHW-LOGO-S]  60.07,27.3 0 bottom
LOGO24  OSHW-LOGOS  [OSHW-LOGO-S]  60.07,37.97 0 bottom
LOGO25  OSHW-LOGOS  [OSHW-LOGO-S]  60.07,48.64 0 bottom
LOGO26  OSHW-LOGOS  [OSHW-LOGO-S]  60.07,59.31 0 bottom
LOGO27  OSHW-LOGOS  [OSHW-LOGO-S]  60.07,69.98 0 bottom
LOGO28  OSHW-LOGOS  [OSHW-LOGO-S]  60.07,80.64 0 bottom
LOGO29  OSHW-LOGOS  [OSHW-LOGO-S]  60.07,91.31 0 bottom
LOGO30  OSHW-LOGOS  [OSHW-LOGO-S]  60.07,101.98 0 bottom
LOGO31  OSHW-LOGOS  [OSHW-LOGO-S]  80.9,5.97 0 bottom
LOGO32  OSHW-LOGOS  [OSHW-LOGO-S]  80.9,16.64 0 bottom
LOGO33  OSHW-LOGOS  [OSHW-LOGO-S]  80.9,27.3 0 bottom
LOGO34  OSHW-LOGOS  [OSHW-LOGO-S]  80.9,37.97 0 bottom
LOGO35  OSHW-LOGOS  [OSHW-LOGO-S]  80.9,48.64 0 bottom
LOGO36  OSHW-LOGOS  [OSHW-LOGO-S]  80.9,59.31 0 bottom
LOGO37  OSHW-LOGOS  [OSHW-LOGO-S]  80.9,69.98 0 bottom
LOGO38  OSHW-LOGOS  [OSHW-LOGO-S]  80.9,80.64 0 bottom
LOGO39  OSHW-LOGOS  [OSHW-LOGO-S]  80.9,91.31 0 bottom
LOGO40  OSHW-LOGOS  [OSHW-LOGO-S]  80.9,101.98 0 bottom
LOGO41  OSHW-LOGOS  [OSHW-LOGO-S]  101.73,5.97 0 bottom
LOGO42  OSHW-LOGOS  [OSHW-LOGO-S]  101.73,16.64 0 bottom
LOGO43  OSHW-LOGOS  [OSHW-LOGO-S]  101.73,27.3 0 bottom
LOGO44  OSHW-LOGOS  [OSHW-LOGO-S]  101.73,37.97 0 bottom
LOGO45  OSHW-LOGOS  [OSHW-LOGO-S]  101.73,48.64 0 bottom
LOGO46  OSHW-LOGOS  [OSHW-LOGO-S]  101.73,59.31 0 bottom
LOGO47  OSHW-LOGOS  [OSHW-LOGO-S]  101.73,69.98 0 bottom
LOGO48  OSHW-LOGOS  [OSHW-LOGO-S]  101.73,80.64 0 bottom
LOGO49  OSHW-LOGOS  [OSHW-LOGO-S]  101.73,91.31 0 bottom
LOGO50  OSHW-LOGOS  [OSHW-LOGO-S]  101.73,101.98 0 bottom
U1  JST_VERTICAL  [JST-6-SMD-VERT-1.0MM]  10.16,2.54 0 top
U2  JST_VERTICAL  [JST-6-SMD-VERT-1.0MM]  10.16,13.21 0 top
U3  JST_VERTICAL  [JST-6-SMD-VERT-1.0MM]  10.16,23.88 0 top
U4  JST_VERTICAL  [JST-6-SMD-VERT-1.0MM]  10.16,34.54 0 top
U5  JST_VERTICAL  [JST-6-SMD-VERT-1.0MM]  10.16,45.21 0 top
U6  JST_VERTICAL  [JST-6-SMD-VERT-1.0MM]  10.16,55.88 0 top
U7  JST_VERTICAL  [JST-6-SMD-VERT-1.0MM]  10.16,66.55 0 top
U8  JST_VERTICAL  [JST-6-SMD-VERT-1.0MM]  10.16,77.22 0 top
U9  JST_VERTICAL  [JST-6-SMD-VERT-1.0MM]  10.16,87.88 0 top
U10  JST_VERTICAL  [JST-6-SMD-VERT-1.0MM]  10.16,98.55 0 top
U11  JST_VERTICAL  [JST-6-SMD-VERT-1.0MM]  30.99,2.54 0 top
U12  JST_VERTICAL  [JST-6-SMD-VERT-1.0MM]  30.99,13.21 0 top
U13  JST_VERTICAL  [JST-6-SMD-VERT-1.0MM]  30.99,23.88 0 top
U14  JST_VERTICAL  [JST-6-SMD-VERT-1.0MM]  30.99,34.54 0 top
U15  JST_VERTICAL  [JST-6-SMD-VERT-1.0MM]  30.99,45.21 0 top
U16  JST_VERTICAL  [JST-6-SMD-VERT-1.0MM]  30.99,55.88 0 top
U17  JST_VERTICAL  [JST-6-SMD-VERT-1.0MM]  30.99,66.55 0 top
U18  JST_VERTICAL  [JST-6-SMD-VERT-1.0MM]  30.99,77.22 0 top
U19  JST_VERTICAL  [JST-6-SMD-VERT-1.0MM]  30.99,87.88 0 top
U20  JST_VERTICAL  [JST-6-SMD-VERT-1.0MM]  30.99,98.55 0 top
U21  JST_VERTICAL  [JST-6-SMD-VERT-1.0MM]  51.82,2.54 0 top
U22  JST_VERTICAL  [JST-6-SMD-VERT-1.0MM]  51.82,13.21 0 top
U23  JST_VERTICAL  [JST-6-SMD-VERT-1.0MM]  51.82,23.88 0 top
U24  JST_VERTICAL  [JST-6-SMD-VERT-1.0MM]  51.82,34.54 0 top
U25  JST_VERTICAL  [JST-6-SMD-VERT-1.0MM]  51.82,45.21 0 top
U26  JST_VERTICAL  [JST-6-SMD-VERT-1.0MM]  51.82,55.88 0 top
U27  JST_VERTICAL  [JST-6-SMD-VERT-1.0MM]  51.82,66.55 0 top
U28  JST_VERTICAL  [JST-6-SMD-VERT-1.0MM]  51.82,77.22 0 top
U29  JST_VERTICAL  [JST-6-SMD-VERT-1.0MM]  51.82,87.88 0 top
U30  JST_VERTICAL  [JST-6-SMD-VERT-1.0MM]  51.82,98.55 0 top
U31  JST_VERTICAL  [JST-6-SMD-VERT-1.0MM]  72.64,2.54 0 top
U32  JST_VERTICAL  [JST-6-SMD-VERT-1.0MM]  72.64,13.21 0 top
U33  JST_VERTICAL  [JST-6-SMD-VERT-1.0MM]  72.64,23.88 0 top
U34  JST_VERTICAL  [JST-6-SMD-VERT-1.0MM]  72.64,34.54 0 top
U35  JST_VERTICAL  [JST-6-SMD-VERT-1.0MM]  72.64,45.21 0 top
U36  JST_VERTICAL  [JST-6-SMD-VERT-1.0MM]  72.64,55.88 0 top
U37  JST_VERTICAL  [JST-6-SMD-VERT-1.0MM]  72.64,66.55 0 top
U38  JST_VERTICAL  [JST-6-SMD-VERT-1.0MM]  72.64,77.22 0 top
U39  JST_VERTICAL  [JST-6-SMD-VERT-1.0MM]  72.64,87.88 0 top
U40  JST_VERTICAL  [JST-6-SMD-VERT-1.0MM]  72.64,98.55 0 top
U41  JST_VERTICAL  [JST-6-SMD-VERT-1.0MM]  93.47,2.54 0 top
U42  JST_VERTICAL  [JST-6-SMD-VERT-1.0MM]  93.47,13.21 0 top
U43  JST_VERTICAL  [JST-6-SMD-VERT-1.0MM]  93.47,23.88 0 top
U44  JST_VERTICAL  [JST-6-SMD-VERT-1.0MM]  93.47,34.54 0 top
U45  JST_VERTICAL  [JST-6-SMD-VERT-1.0MM]  93.47,45.21 0 top
U46  JST_VERTICAL  [JST-6-SMD-VERT-1.0MM]  93.47,55.88 0 top
U47  JST_VERTICAL  [JST-6-SMD-VERT-1.0MM]  93.47,66.55 0 top
U48  JST_VERTICAL  [JST-6-SMD-VERT-1.0MM]  93.47,77.22 0 top
U49  JST_VERTICAL  [JST-6-SMD-VERT-1.0MM]  93.47,87.88 0 top
U50  JST_VERTICAL  [JST-6-SMD-VERT-1.0MM]  93.47,98.55 0 top

## Library data of the parts
FID1-FID100 LOGO1-LOGO50 = SparkFun-Aesthetics
JP1 JP9 JP14 JP19 JP24 JP29 JP34 JP39 JP44 JP49 JP54 JP59 JP64 JP69 JP74 JP79 JP84 JP89 JP94 JP99 JP104 JP109 JP114 JP119 JP124 JP129 JP134 JP139 JP144 JP149 JP154 JP159 JP164 JP169 JP174 JP179 JP184 JP189 JP194 JP199 JP204 JP209 JP214 JP219 JP224 JP229 JP234 JP239 JP244 JP249 U1-U50 = SparkFun-Connectors
JP2-JP8 JP10-JP13 JP15-JP18 JP20-JP23 JP25-JP28 JP30-JP33 JP35-JP38 JP40-JP43 JP45-JP48 JP50-JP53 JP55-JP58 JP60-JP63 JP65-JP68 JP70-JP73 JP75-JP78 JP80-JP83 JP85-JP88 JP90-JP93 JP95-JP98 JP100-JP103 JP105-JP108 JP110-JP113 JP115-JP118 JP120-JP123 JP125-JP128 JP130-JP133 JP135-JP138 JP140-JP143 JP145-JP148 JP150-JP153 JP155-JP158 JP160-JP163 JP165-JP168 JP170-JP173 JP175-JP178 JP180-JP183 JP185-JP188 JP190-JP193 JP195-JP198 JP200-JP203 JP205-JP208 JP210-JP213 JP215-JP218 JP220-JP223 JP225-JP228 JP230-JP233 JP235-JP238 JP240-JP243 JP245-JP248 JP250 = SparkFun

## Nets
N$1: JP1.1 U1.6
N$2: JP1.2 U1.5
N$3: JP1.3 U1.4
N$4: JP1.4 U1.3
N$5: JP1.5 U1.2
N$6: JP1.6 U1.1
N$7: JP9.1 U2.6
N$8: JP9.2 U2.5
N$9: JP9.3 U2.4
N$10: JP9.4 U2.3
N$11: JP9.5 U2.2
N$12: JP9.6 U2.1
N$13: JP14.1 U3.6
N$14: JP14.2 U3.5
N$15: JP14.3 U3.4
N$16: JP14.4 U3.3
N$17: JP14.5 U3.2
N$18: JP14.6 U3.1
N$19: JP19.1 U4.6
N$20: JP19.2 U4.5
N$21: JP19.3 U4.4
N$22: JP19.4 U4.3
N$23: JP19.5 U4.2
N$24: JP19.6 U4.1
N$25: JP24.1 U5.6
N$26: JP24.2 U5.5
N$27: JP24.3 U5.4
N$28: JP24.4 U5.3
N$29: JP24.5 U5.2
N$30: JP24.6 U5.1
N$31: JP29.1 U6.6
N$32: JP29.2 U6.5
N$33: JP29.3 U6.4
N$34: JP29.4 U6.3
N$35: JP29.5 U6.2
N$36: JP29.6 U6.1
N$37: JP34.1 U7.6
N$38: JP34.2 U7.5
N$39: JP34.3 U7.4
N$40: JP34.4 U7.3
N$41: JP34.5 U7.2
N$42: JP34.6 U7.1
N$43: JP39.1 U8.6
N$44: JP39.2 U8.5
N$45: JP39.3 U8.4
N$46: JP39.4 U8.3
N$47: JP39.5 U8.2
N$48: JP39.6 U8.1
N$49: JP44.1 U9.6
N$50: JP44.2 U9.5
N$51: JP44.3 U9.4
N$52: JP44.4 U9.3
N$53: JP44.5 U9.2
N$54: JP44.6 U9.1
N$55: JP49.1 U10.6
N$56: JP49.2 U10.5
N$57: JP49.3 U10.4
N$58: JP49.4 U10.3
N$59: JP49.5 U10.2
N$60: JP49.6 U10.1
N$61: JP54.1 U11.6
N$62: JP54.2 U11.5
N$63: JP54.3 U11.4
N$64: JP54.4 U11.3
N$65: JP54.5 U11.2
N$66: JP54.6 U11.1
N$67: JP59.1 U12.6
N$68: JP59.2 U12.5
N$69: JP59.3 U12.4
N$70: JP59.4 U12.3
N$71: JP59.5 U12.2
N$72: JP59.6 U12.1
N$73: JP64.1 U13.6
N$74: JP64.2 U13.5
N$75: JP64.3 U13.4
N$76: JP64.4 U13.3
N$77: JP64.5 U13.2
N$78: JP64.6 U13.1
N$79: JP69.1 U14.6
N$80: JP69.2 U14.5
N$81: JP69.3 U14.4
N$82: JP69.4 U14.3
N$83: JP69.5 U14.2
N$84: JP69.6 U14.1
N$85: JP74.1 U15.6
N$86: JP74.2 U15.5
N$87: JP74.3 U15.4
N$88: JP74.4 U15.3
N$89: JP74.5 U15.2
N$90: JP74.6 U15.1
N$91: JP79.1 U16.6
N$92: JP79.2 U16.5
N$93: JP79.3 U16.4
N$94: JP79.4 U16.3
N$95: JP79.5 U16.2
N$96: JP79.6 U16.1
N$97: JP84.1 U17.6
N$98: JP84.2 U17.5
N$99: JP84.3 U17.4
N$100: JP84.4 U17.3
N$101: JP84.5 U17.2
N$102: JP84.6 U17.1
N$103: JP89.1 U18.6
N$104: JP89.2 U18.5
N$105: JP89.3 U18.4
N$106: JP89.4 U18.3
N$107: JP89.5 U18.2
N$108: JP89.6 U18.1
N$109: JP94.1 U19.6
N$110: JP94.2 U19.5
N$111: JP94.3 U19.4
N$112: JP94.4 U19.3
N$113: JP94.5 U19.2
N$114: JP94.6 U19.1
N$115: JP99.1 U20.6
N$116: JP99.2 U20.5
N$117: JP99.3 U20.4
N$118: JP99.4 U20.3
N$119: JP99.5 U20.2
N$120: JP99.6 U20.1
N$121: JP104.1 U21.6
N$122: JP104.2 U21.5
N$123: JP104.3 U21.4
N$124: JP104.4 U21.3
N$125: JP104.5 U21.2
N$126: JP104.6 U21.1
N$127: JP109.1 U22.6
N$128: JP109.2 U22.5
N$129: JP109.3 U22.4
N$130: JP109.4 U22.3
N$131: JP109.5 U22.2
N$132: JP109.6 U22.1
N$133: JP114.1 U23.6
N$134: JP114.2 U23.5
N$135: JP114.3 U23.4
N$136: JP114.4 U23.3
N$137: JP114.5 U23.2
N$138: JP114.6 U23.1
N$139: JP119.1 U24.6
N$140: JP119.2 U24.5
N$141: JP119.3 U24.4
N$142: JP119.4 U24.3
N$143: JP119.5 U24.2
N$144: JP119.6 U24.1
N$145: JP124.1 U25.6
N$146: JP124.2 U25.5
N$147: JP124.3 U25.4
N$148: JP124.4 U25.3
N$149: JP124.5 U25.2
N$150: JP124.6 U25.1
N$151: JP129.1 U26.6
N$152: JP129.2 U26.5
N$153: JP129.3 U26.4
N$154: JP129.4 U26.3
N$155: JP129.5 U26.2
N$156: JP129.6 U26.1
N$157: JP134.1 U27.6
N$158: JP134.2 U27.5
N$159: JP134.3 U27.4
N$160: JP134.4 U27.3
N$161: JP134.5 U27.2
N$162: JP134.6 U27.1
N$163: JP139.1 U28.6
N$164: JP139.2 U28.5
N$165: JP139.3 U28.4
N$166: JP139.4 U28.3
N$167: JP139.5 U28.2
N$168: JP139.6 U28.1
N$169: JP144.1 U29.6
N$170: JP144.2 U29.5
N$171: JP144.3 U29.4
N$172: JP144.4 U29.3
N$173: JP144.5 U29.2
N$174: JP144.6 U29.1
N$175: JP149.1 U30.6
N$176: JP149.2 U30.5
N$177: JP149.3 U30.4
N$178: JP149.4 U30.3
N$179: JP149.5 U30.2
N$180: JP149.6 U30.1
N$181: JP154.1 U31.6
N$182: JP154.2 U31.5
N$183: JP154.3 U31.4
N$184: JP154.4 U31.3
N$185: JP154.5 U31.2
N$186: JP154.6 U31.1
N$187: JP159.1 U32.6
N$188: JP159.2 U32.5
N$189: JP159.3 U32.4
N$190: JP159.4 U32.3
N$191: JP159.5 U32.2
N$192: JP159.6 U32.1
N$193: JP164.1 U33.6
N$194: JP164.2 U33.5
N$195: JP164.3 U33.4
N$196: JP164.4 U33.3
N$197: JP164.5 U33.2
N$198: JP164.6 U33.1
N$199: JP169.1 U34.6
N$200: JP169.2 U34.5
N$201: JP169.3 U34.4
N$202: JP169.4 U34.3
N$203: JP169.5 U34.2
N$204: JP169.6 U34.1
N$205: JP174.1 U35.6
N$206: JP174.2 U35.5
N$207: JP174.3 U35.4
N$208: JP174.4 U35.3
N$209: JP174.5 U35.2
N$210: JP174.6 U35.1
N$211: JP179.1 U36.6
N$212: JP179.2 U36.5
N$213: JP179.3 U36.4
N$214: JP179.4 U36.3
N$215: JP179.5 U36.2
N$216: JP179.6 U36.1
N$217: JP184.1 U37.6
N$218: JP184.2 U37.5
N$219: JP184.3 U37.4
N$220: JP184.4 U37.3
N$221: JP184.5 U37.2
N$222: JP184.6 U37.1
N$223: JP189.1 U38.6
N$224: JP189.2 U38.5
N$225: JP189.3 U38.4
N$226: JP189.4 U38.3
N$227: JP189.5 U38.2
N$228: JP189.6 U38.1
N$229: JP194.1 U39.6
N$230: JP194.2 U39.5
N$231: JP194.3 U39.4
N$232: JP194.4 U39.3
N$233: JP194.5 U39.2
N$234: JP194.6 U39.1
N$235: JP199.1 U40.6
N$236: JP199.2 U40.5
N$237: JP199.3 U40.4
N$238: JP199.4 U40.3
N$239: JP199.5 U40.2
N$240: JP199.6 U40.1
N$241: JP204.1 U41.6
N$242: JP204.2 U41.5
N$243: JP204.3 U41.4
N$244: JP204.4 U41.3
N$245: JP204.5 U41.2
N$246: JP204.6 U41.1
N$247: JP209.1 U42.6
N$248: JP209.2 U42.5
N$249: JP209.3 U42.4
N$250: JP209.4 U42.3
N$251: JP209.5 U42.2
N$252: JP209.6 U42.1
N$253: JP214.1 U43.6
N$254: JP214.2 U43.5
N$255: JP214.3 U43.4
N$256: JP214.4 U43.3
N$257: JP214.5 U43.2
N$258: JP214.6 U43.1
N$259: JP219.1 U44.6
N$260: JP219.2 U44.5
N$261: JP219.3 U44.4
N$262: JP219.4 U44.3
N$263: JP219.5 U44.2
N$264: JP219.6 U44.1
N$265: JP224.1 U45.6
N$266: JP224.2 U45.5
N$267: JP224.3 U45.4
N$268: JP224.4 U45.3
N$269: JP224.5 U45.2
N$270: JP224.6 U45.1
N$271: JP229.1 U46.6
N$272: JP229.2 U46.5
N$273: JP229.3 U46.4
N$274: JP229.4 U46.3
N$275: JP229.5 U46.2
N$276: JP229.6 U46.1
N$277: JP234.1 U47.6
N$278: JP234.2 U47.5
N$279: JP234.3 U47.4
N$280: JP234.4 U47.3
N$281: JP234.5 U47.2
N$282: JP234.6 U47.1
N$283: JP239.1 U48.6
N$284: JP239.2 U48.5
N$285: JP239.3 U48.4
N$286: JP239.4 U48.3
N$287: JP239.5 U48.2
N$288: JP239.6 U48.1
N$289: JP244.1 U49.6
N$290: JP244.2 U49.5
N$291: JP244.3 U49.4
N$292: JP244.4 U49.3
N$293: JP244.5 U49.2
N$294: JP244.6 U49.1
N$295: JP249.1 U50.6
N$296: JP249.2 U50.5
N$297: JP249.3 U50.4
N$298: JP249.4 U50.3
N$299: JP249.5 U50.2
N$300: JP249.6 U50.1